# Altium PCB STM32F_Board_PCB.PcbDoc (part 2 of 2)
Units mm, origin at the board's own origin, x right, y up, seen from the top; angles counter-clockwise.
Board outline 53.26 x 36.83 mm, 2 copper layers (Top Layer, Bottom Layer), stack 1.549 mm thick; 46 components, 35 nets, 187 pads, 21 vias.
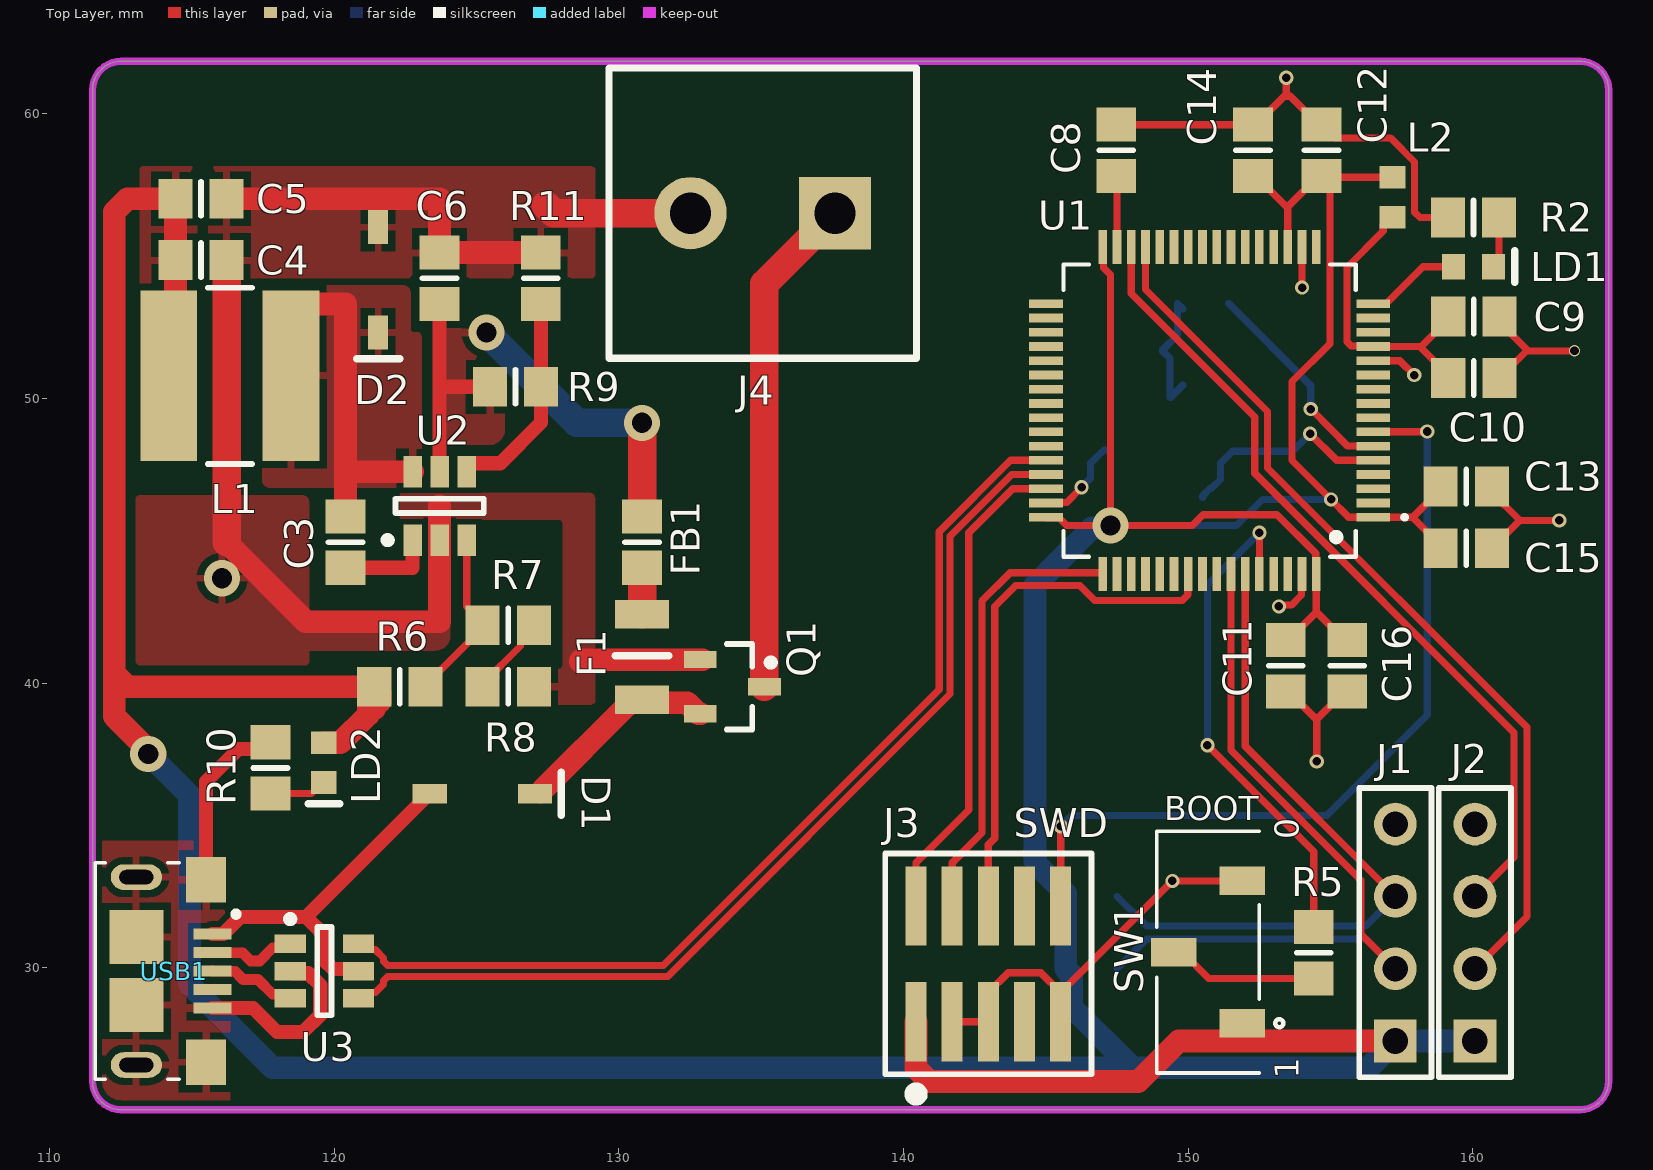
[diagram p0: Top Layer view]

## Part data (continued)
SW1: library part JS102011JCQN, "C & K COMPONENTS - Schiebeschalter, Subminiatur, SPDT, Ein-Ein, Oberflächenmontage, JS Series, 300 mA", Current Rating=300mA, Manufacturer="ITT C&K", Max Operating Temperature=85°C, Min Operating Temperature=-40°C, Supplier Part Number 1=3275788, Voltage Rating (DC)=6V, Actuator Length=2mm, Actuator Material=Nylon,Polyamide, Actuator Type=Standard, ComponentLink1Description=http://www.farnell.com/datasheets/2674788.pdf?src-supplier=Farnell, ComponentLink1URL=http://www.farnell.com/datasheets/2674788.pdf?src-supplier=Farnell, ComponentLink2Description=https://www.ckswitches.com/media/1422/js.pdf?src-supplier=Digi-Key, ComponentLink2URL=https://www.ckswitches.com/media/1422/js.pdf?src-supplier=Digi-Key, ComponentLink3Description=http://www.farnell.com/datasheets/2674788.pdf?src-supplier=Newark, ComponentLink3URL=http://www.farnell.com/datasheets/2674788.pdf?src-supplier=Newark, ComponentLink4Description=http://www.farnell.com/datasheets/2674788.pdf?src-supplier=Element14, ComponentLink4URL=http://www.farnell.com/datasheets/2674788.pdf?src-supplier=Element14, Contact Material="Copper Alloy", Contact Plating=Silver, Electrical Life=5000Cycles, Manufacturer Part Number=JS102011JCQN, Mount="Surface Mount", Packaging="Cut Tape", Pricing 1="1=0,61800, 10=0,59900, 25=0,58700, 50=0,52300, 100=0,49800, 250=0,48600, 500=0,40900 (GBP)", RoHS=Yes, Stock 1=892, Supplier 1=Farnell, Switch Function=On-On, Switch Travel=2mm, Throw Configuration=SPDT
U1: "STM32F4 MCU", Supplier Part Number 1=2064363, Built_By=EMA_UL_Team, Copyright="Copyright (C) 2018 Accelerated Designs. All rights reserved", Manufacturer_Part_Number=STM32F405RGT6, RefDes=RefDes, SourceLibrary=Updates_to_database_2020-10-19, Supplier 1=Farnell, Type=DEV, Vendor=STMicroelectronics
U2: "Voltage Regulators - Switching Regulators 1A 24V 1.4MHz Non-sync Buck", Case/Package=SOT-23-6, Manufacturer="Monolithic Power Systems", Max Input Voltage=24V, Max Operating Temperature=85°C, Max Output Current=1.2A, Max Output Voltage=15V, Min Input Voltage=4.5V, Min Operating Temperature=-40°C, Min Output Voltage=810mV, Output Power=568mW, Package Quantity=500, Supplier Part Number 1=3357992, Switching Frequency=1.4MHz, Category="Voltage Regulators - Switching", ComponentLink1Description=http://www.mouser.com/ds/2/277/MP2359_r1.21-477634.pdf?src-supplier=Mouser, ComponentLink1URL=http://www.mouser.com/ds/2/277/MP2359_r1.21-477634.pdf?src-supplier=Mouser, ComponentLink2Description=https://www.monolithicpower.com/DesktopModules/DocumentManage/API/Document/GetDocument?id=269&src-supplier=Avnet, ComponentLink2URL=https://www.monolithicpower.com/DesktopModules/DocumentManage/API/Document/GetDocument?id=269&src-supplier=Avnet, ComponentLink3Description=http://www.monolithicpower.com/DesktopModules/DocumentManage/API/Document/getDocument?id=269&src-supplier=Digi-Key, ComponentLink3URL=http://www.monolithicpower.com/DesktopModules/DocumentManage/API/Document/getDocument?id=269&src-supplier=Digi-Key, Efficiency=92%, Lead Free="Lead Free", Manufacturer Part Number=MP2359DJ-LF-P, Mount="Surface Mount", Number of Outputs=1, Number of Pins=6, Operating Supply Voltage=24V, Output Configuration=Positive, Output Current=1.2A, Output Type=Adjustable, Output Voltage=15V, Packaging="Tape and Reel", Pricing 1="1=1,27000, 10=1,24000, 25=1,21000, 50=1,18000, 100=1,14000, 250=1,11000, 500=1,08000, 1000=1,05000 (GBP)", RoHS=Yes, Supplier 1=Farnell, Synchronous Rectifier=No
U3: "TVS DIODE 5.25V 17V SOT23-6", Breakdown Voltage=6V, Capacitance=3.5pF, Case/Package=SOT-23, Clamping Voltage=17V, Leakage Current=150nA, Manufacturer=STMicroelectronics, Max Operating Temperature=125°C, Min Operating Temperature=-40°C, Operating Supply Voltage=1.1V, Package Quantity=3000, Peak Pulse Current=5A, Power Line Protection=Yes, Reverse Standoff Voltage=5.25V, Supplier Part Number 1=1269406, Test Current=1mA, Working Voltage=5V, Category="TVS Diodes", Clamping Voltage-Max=17V, ComponentLink1Description=https://datasheet.ciiva.com/1268/1690354-1268384.pdf?src-supplier=Element14, ComponentLink1URL=https://datasheet.ciiva.com/1268/1690354-1268384.pdf?src-supplier=Element14, ComponentLink2Description=https://datasheet.ciiva.com/4508/cd00050750-113117-4508433.pdf?src-supplier=Mouser, ComponentLink2URL=https://datasheet.ciiva.com/4508/cd00050750-113117-4508433.pdf?src-supplier=Mouser, ComponentLink3Description=https://datasheet.ciiva.com/15143/getdatasheetpartid-148465-15143789.pdf?src-supplier=Verical, ComponentLink3URL=https://datasheet.ciiva.com/15143/getdatasheetpartid-148465-15143789.pdf?src-supplier=Verical, ComponentLink4Description=https://datasheet.ciiva.com/26787/usblc6-2sc6-26787908.pdf?src-supplier=IIIC, ComponentLink4URL=https://datasheet.ciiva.com/26787/usblc6-2sc6-26787908.pdf?src-supplier=IIIC, ComponentLink5Description=https://datasheet.ciiva.com/16200/cd00050750-16200026.pdf?src-supplier=Future+Electronics, ComponentLink5URL=https://datasheet.ciiva.com/16200/cd00050750-16200026.pdf?src-supplier=Future+Electronics, ComponentLink6Description=https://datasheet.ciiva.com/41444/001184109-da-01-en-ic-esd-protecti-usblc6-2sc6-sot-23-6-stm-41444156.pdf?src-supplier=Conrad, ComponentLink6URL=https://datasheet.ciiva.com/41444/001184109-da-01-en-ic-esd-protecti-usblc6-2sc6-sot-23-6-stm-41444156.pdf?src-supplier=Conrad, Contact Plating=Tin,Matte, Data Rate=480Mbps, Depth=1.75mm, Direction=Unidirectional,Bidirectional, Element Configuration=Dual, ESD Protection=Yes, Height=1.3mm, Lead Free="Lead Free", Length=3.05mm, Manufacturer Part Number=USBLC6-2SC6, Max Breakdown Voltage=6V, Max Reverse Leakage Current=150nA, Min Breakdown Voltage=6V, Mount="Surface Mount", Number of Bidirectional Channels=2, Number of Channels=2, Number of Elements=1, Number of Pins=6, Packaging="Tape and Reel", Polarity=Unidirectional,Bidirectional, Pricing 1="5=0,34800, 50=0,28400, 100=0,21800, 500=0,18600, 1500=0,15300 (GBP)", Radiation Hardening=No, REACH SVHC="No SVHC", Reverse Breakdown Voltage=6V, RoHS=Yes, RoHS Compliant=Yes, Series=USB, Stock 1=9341, Supplier 1=Farnell, Termination=SMD/SMT, Width=1.75mm
USB1: library part USB_Micro_B, "Conn Micro USB 2.0 Type B RCP 5 POS 0.65mm Solder RA SMD 5 Terminal 1 Port T/R", Manufacturer="Amphenol ICC", Manufacturer Part Number=10118193-0001LF, Supplier Part Number 1=2751675, Category="USB Connectors", ComponentLink1Description=http://www.farnell.com/cad/1935764.pdf?src-supplier=Farnell, ComponentLink1URL=http://www.farnell.com/cad/1935764.pdf?src-supplier=Farnell, ComponentLink2Description=http://www.farnell.com/datasheets/2366786.pdf?src-supplier=Newark, ComponentLink2URL=http://www.farnell.com/datasheets/2366786.pdf?src-supplier=Newark, Pricing 1="10=0,27100, 100=0,23200, 500=0,21300, 1000=0,20100, 2500=0,20000, 5000=0,18300 (GBP)", RoHS=Yes, Stock 1=28194, Supplier 1=Farnell
Y1: library part Crystal_16MHz_3225, "Oscillator, 16Mhz, 3.2Mm X 2.5Mm, Cmos Frequency Nom 16Mhz", Manufacturer=ABRACON, Manufacturer Part Number=ABM8AIG-16.000MHZ-12-2Z-T, Supplier Part Number 1=2849442, Pricing 1="5=0,58300, 50=0,47400, 250=0,41200, 500=0,40100, 1500=0,39600, 3000=0,39000, 15000=0,38200, 30000=0,37400 (GBP)", Stock 1=655, Supplier 1=Farnell

## Via types
v1: diameter 0.5, hole 0.3, Top Layer to Bottom Layer, 15 vias
v2: diameter 1.27, hole 0.711, Top Layer to Bottom Layer, 5 vias
v3: diameter 0.4, hole 0.3, Top Layer to Bottom Layer, 1 vias

## Nets (pads, with @x,y where several pads share a name; then routed paths per layer and width w, separated by ;. In a path a pad name is that pad's centre, name@x,y a point inside that pad or via, vN(x,y) a via of type N, cw(c..) or ccw(c..) an arc to the next point about the centre after c; other vN are vias at no path point)
+3V3: C4.2 C5.2 C11.2 C12.2 C13.2 C14.2 C15.2 C16.1 J1.1 J2.1 J3.1 L1.2 L2.1 LD2.1 R3.2 R4.2 R6.2 SW1.1 U1.1 U1.19 U1.32 U1.48 U1.64 | length 197.3
  Top Layer w0.254: U1.48 145.024,45.805 145.469,45.805 145.732,45.542 146.8,45.542 146.96,45.702 v2@146.96,45.851 ; U1.32 147.02,55.31 147.02,54.598 147.269,54.349 147.269,46.012 147.079,45.822 146.99,45.822 v2(147.269,45.542) 150.141,45.542 150.522,45.923 153.118,45.923 154.478,44.563 154.478,43.851 U1.64 154.499,42.49 ; C14.2 152.373,57.825 153.499,56.699 ; C11.2 153.524,41.515 154.499,42.49 ; U1.19 153.499,56.699 ; C12.2@154.978,57.825 C12.2 154.586,57.825 153.499,56.738 153.499,56.699 ; C16.1 155.486,41.515 154.511,42.49 154.499,42.49 ; L2.1 154.978,57.774 154.978,51.931 153.649,50.601 153.649,47.824 v1(155.016,46.457) 155.642,45.831 U1.1 157.879,45.831 ; C15.2 158.866,44.844 157.879,45.831 ; C13.2 158.866,46.807 157.89,45.831 157.879,45.831
  Top Layer w0.8: v2(113.462,37.516) 113.462,37.643 112.268,38.837 112.268,40.347 ; L1.2@114.416,50.165 C4.2 C5.2 112.737,57.023 112.268,56.554 112.268,40.347 ; LD2.1 120.207,37.911 121.201,38.905 R6.2@121.201,39.327 ; 120.766,39.878 112.737,39.878 112.268,40.347 ; 121.412,39.116 R6.2@121.201,39.327 ; R6.2@121.601,39.361 121.601,39.678 R6.2 121.201,39.678 R6.2@121.201,39.327 ; J3.1 140.437,26.478 140.905,26.01 148.244,26.01 149.666,27.432 J1.1
  Bottom Layer w0.254: v2(147.269,45.542) 151.696,45.542 152.61,46.457 v1(155.016,46.457)
  Bottom Layer w0.8: v2(113.462,37.516) 114.91,36.068 114.91,29.413 117.831,26.492 148.031,26.492 ; v2(147.269,45.542) 147.179,45.452 146.62,45.452 145.489,44.321 144.613,43.444 144.613,33.697 145.698,32.612 R3.2 R4.2 145.898,29.772 145.898,28.626 148.031,26.492 ; J2.1 J1.1 156.337,26.492 148.031,26.492
+3V3VA: C9.2 C10.2 L2.2 U1.13 | length 10.7
  Top Layer w0.254: L2.2 157.125,56.374 156.852,56.101 156.852,55.887 155.575,54.61 155.575,52 155.724,51.851 156.478,51.851 U1.13 158.182,51.831 ; C10.2 159.134,50.824 158.182,51.776 158.182,51.831 ; C9.2 159.134,52.783 158.182,51.831
+5V: D1.1 U3.5 USB1.1 | length 12.8
  Top Layer w0.5: USB1.1 116.095,31.19 116.697,31.792 119.008,31.792 ; U3.5 120.774,29.965 119.955,29.965 119.649,30.271 119.649,31.151 119.008,31.792 ; D1.1@123.343,36.127 119.008,31.792
+12V: J4.1 Q1.1 | length 17.7
  Top Layer w1: Q1.1 135.11,54.033 J4.1
BOOT0: R5.1 U1.60 | length 17.6
  Top Layer w0.254: v1(150.673,37.821) 154.407,34.087 R5.1 ; U1.60 152.502,43.833 v1(152.502,45.288)
  Bottom Layer w0.254: v1(150.673,37.821) 150.673,43.459 v1(152.502,45.288)
BUCK_FB: R6.1 R7.2 U2.3 | length 6.2
  Top Layer w0.254: R6.1 123.201,39.978 123.674,40.451 123.725,40.451 125.211,41.937 125.211,42.137 R7.2@124.648,42.7
  Top Layer w0.255: R7.2@124.648,42.7 U2.3
GND: C1.1 C2.2 C4.1 C5.1 C6.1 C7.1 C8.1 C9.1 C10.1 C11.1 C12.1 C13.1 C14.1 C15.1 C16.2 D2.1 J1.4 J2.4 J3.3 J3.5 J3.9 J4.2 Q1.3 R2.1 R8.1 R10.1 R11.1 SW1.3 U1.12 U1.18 U1.63 U2.2 U3.2 USB1.5 USB1.S1 USB1.S2 USB1.S3 USB1.S4 USB1.S5 USB1.S6 Y1.2 Y1.4 | length 105.7
  Top Layer w0.254: J3.3 J3.5 142.977,29.134 143.674,29.831 144.82,29.831 J3.9@145.517,29.134 ; J3.9 J3.9@145.517,29.134 ; C8.1 C14.1 ; v1@149.428,33.045 J3.9@145.517,29.134 ; v1(149.443,33.056) SW1.3 ; C14.1@152.373,59.625 153.247,60.499 153.374,60.626 ; v1(153.187,42.697) 153.234,42.744 153.624,42.744 153.978,43.098 153.978,43.81 U1.63 ; v1(153.445,61.269) 153.445,60.697 153.374,60.626 ; C11.1@153.524,39.715 154.499,38.739 154.511,38.739 ; v1(154,53.899) U1.18 ; v1(154.511,37.253) 154.511,38.739 ; C12.1@154.586,59.625 153.585,60.626 153.374,60.626 ; C12.1 155.159,59.152 157.11,59.152 157.952,58.309 157.952,56.549 158.139,56.363 R2.1 ; C16.2@155.486,39.715 154.511,38.739 ; U1.12@156.52,51.31 U1.12 157.432,51.331 v1(157.937,50.825) ; J1.4@157.121,35.039 J1.4 ; C15.1 161.642,45.72 161.653,45.72 ; C13.1@160.666,46.707 161.653,45.72 ; C10.1@160.934,50.624 C10.1 161.886,51.676 v3(163.57,51.676) ; C9.1@160.934,52.683 161.886,51.731 ; v1(163.033,45.72) 161.653,45.72
  Top Layer w0.5: USB1.S1 115.495,36.552 116.631,37.687 117.517,37.687 R10.1 ; USB1.5 117.145,28.59 117.99,27.745 118.901,27.745 119.503,28.346 119.503,29.397 119.086,29.815 118.524,29.815 U3.2
  Top Layer w0.8: 116.216,44.947 118.999,42.164 123.698,42.164 U2.2 123.698,46.228 ; C5.1 121.412,57.023 123.698,57.023 C6.1 R11.1 ; 128.651,40.767 cw(c128.712,40.767) 128.712,40.828 Q1.3 Q1.3@132.935,40.828
  Top Layer w1: 116.216,44.947 C4.1 ; 127.432,56.794 127.711,56.515 J4.2
  other v2: 116.053,43.688
HSE_IN: C1.2 U1.5 Y1.1 | length 7.6
  Top Layer w0.254: v1(154.28,48.768) 155.217,47.831 U1.5
  Bottom Layer w0.254: C1.2 150.506,46.583 150.779,46.856 150.829,46.856 151.133,47.16 151.133,47.725 151.556,48.148 Y1.1@151.629,48.148 ; Y1.1 153.66,48.148 v1(154.28,48.768)
HSE_OUT: R1.2 U1.6 | length 7.6
  Top Layer w0.254: v1(154.305,49.632) 154.308,49.632 154.996,48.944 154.996,48.94 155.606,48.331 U1.6
  Bottom Layer w0.254: R1.2 154.305,50.455 v1(154.305,49.632)
I2C1_SCL: J1.2 R4.1 U1.58 | length 26.9
  Top Layer w0.254: U1.58 151.499,37.648 156.07,33.077 156.07,31.179 J1.2
  Bottom Layer w0.254: R4.1 148.541,31.015 156.234,31.015 J1.2
I2C1_SDA: J1.3 R3.1 U1.59 | length 24.1
  Top Layer w0.254: U1.59 151.999,37.79 J1.3
  Bottom Layer w0.254: R3.1 148.541,31.469 156.234,31.469 J1.3
LED_STATUS: LD1.1 U1.16 | length 3.4
  Top Layer w0.254: U1.16 156.944,53.331 158.248,54.635 LD1.1
NetC2_1: C2.1 R1.1 Y1.3 | length 4.5
  Bottom Layer w0.254: Y1.3@149.806,50.471 149.383,50.048 Y1.3 149.356,51.414 C2.1 149.106,51.714 149.62,52.228 R1.1 R1.1@149.806,53.154
NetC3_1: C3.1 D2.2 L1.1 U2.6 | length 14.9
  Top Layer w0.8: L1.1@118.491,50.165 118.491,53.323 120.396,53.323 120.396,47.428 ; C3.1 120.396,47.428 ; U2.6 120.396,47.428
NetC3_2: C3.2 U2.1 | length 3.3
  Top Layer w0.5: C3.2 122.748,44.058 U2.1
NetC6_2: C6.2 FB1.2 R9.2 U2.5 | length 17.7
  Top Layer w0.5: U2.5 123.698,50.419 ; C6.2 123.698,50.419 ; R9.2 123.698,50.419
  Top Layer w1: FB1.2 v2(130.81,49.149)
  Bottom Layer w1: v2(125.349,52.324) 128.524,49.149 v2(130.81,49.149)
NetC7_2: C7.2 U1.47 | length 3.2
  Top Layer w0.254: U1.47 145.02,46.351 145.731,46.351 146.253,46.873 v1(146.253,46.883)
  Bottom Layer w0.254: v1(146.253,46.883) 146.569,47.199 146.569,47.725 147.042,48.198 C7.2
NetC8_2: C8.2 U1.31 | length 2.5
  Top Layer w0.254: C8.2 147.499,57.798 U1.31
NetD1_2: D1.2 F1.1 Q1.2 | length 6.6
  Top Layer w0.8: D1.2@127.251,36.169 127.301,36.219 127.301,36.242 130.26,39.201 F1.1@130.26,39.318 ; F1.1 130.91,39.318 132.395,39.318 132.785,38.928 Q1.2
NetF1_2: F1.2 FB1.1 | length 1.6
  Top Layer w1: F1.2 FB1.1
NetLD1_2: LD1.2 R2.2 | length 1.8
  Top Layer w0.254: LD1.2 160.92,54.835 R2.2
NetLD2_2: LD2.2 R10.2 | length 2.4
  Top Layer w0.254: R10.2 119.197,36.124 119.584,36.511 LD2.2 LD2.2@119.907,36.784
NetR5_2: R5.2 SW1.2 | length 5.3
  Top Layer w0.254: SW1.2 149.798,30.556 150.724,29.631 R5.2
NetR7_1: R7.1 R8.2 | length 3.5
  Top Layer w0.254: R8.2 125.211,39.978 126.538,41.305 126.538,41.564 R7.1
  Top Layer w0.5: R8.2 R8.2@125.561,40.228 ; R7.1@127.011,41.937 R7.1
NetR9_1: R9.1 R11.2 U2.4 | length 7.6
  Top Layer w0.5: U2.4 124.648,47.653 124.723,47.728 125.833,47.728 127.265,49.16 127.265,53.329 R11.2
NRST: J3.10 U1.7 | length 29.2
  Top Layer w0.254: J3.10 v1(145.517,34.976) ; U1.7 156.506,48.837 158.388,48.837 v1(158.394,48.844)
  Bottom Layer w0.254: v1(145.517,34.976) 145.898,35.357 154.864,35.357 158.394,38.887 v1(158.394,48.844)
SWCLK: J3.4 U1.49 | length 15.8
  Top Layer w0.254: J3.4 141.707,33.695 142.75,34.738 142.75,42.885 143.749,43.885 146.974,43.885 146.999,43.859 U1.49
SWDIO: J3.2 U1.46 | length 17.2
  Top Layer w0.254: J3.2 140.437,33.695 142.291,35.549 142.291,45.288 143.833,46.831 144.958,46.831 144.978,46.81 U1.46
SWO: J3.6 U1.55 | length 18.7
  Top Layer w0.254: J3.6 142.977,34.323 143.204,34.55 143.204,42.697 143.937,43.431 146.187,43.431 146.711,42.907 149.787,42.907 149.978,43.098 149.978,43.81 U1.55
USART3_RX: J2.3 U1.30 | length 29
  Top Layer w0.254: U1.30 147.999,53.689 152.332,49.356 152.332,47.378 161.446,38.264 161.446,33.887 J2.3
USART3_TX: J2.2 U1.29 | length 31.7
  Top Layer w0.254: U1.29 148.499,53.831 152.786,49.544 152.786,47.566 161.9,38.452 161.9,31.801 J2.2
USB_DATA_N: U1.45 U3.4 | length 35.1
  Top Layer w0.254: U3.4 121.047,29.138 121.435,29.138 121.726,29.429 121.726,29.55 121.875,29.699 131.711,29.699 141.63,39.619 141.63,45.167 143.795,47.331 U1.45
USB_DATA_P: U1.44 U3.6 | length 35.1
  Top Layer w0.254: U3.6 121.047,30.642 121.435,30.642 121.726,30.35 121.726,30.229 121.875,30.08 131.553,30.08 141.249,39.776 141.249,45.324 143.756,47.831 U1.44
USB_IN_N: U3.1 USB1.2 | length 3.1
  Top Layer w0.381: USB1.2 116.195,30.54 116.205,30.53 116.776,30.53 117.062,30.245 117.377,30.245 117.837,30.705 118.315,30.705 U3.1
USB_IN_P: U3.3 USB1.3 | length 3.1
  Top Layer w0.381: USB1.3 115.73,29.88 116.507,29.88 116.792,29.595 117.317,29.595 117.837,29.074 118.315,29.074 U3.3
pads on no net: J3.7 J3.8 U1.2 U1.3 U1.4 U1.8 U1.9 U1.10 U1.11 U1.14 U1.15 U1.17 U1.20 U1.21 U1.22 U1.23 U1.24 U1.25 U1.26 U1.27 U1.28 U1.33 U1.34 U1.35 U1.36 U1.37 U1.38 U1.39 U1.40 U1.41 U1.42 U1.43 U1.50 U1.51 U1.52 U1.53 U1.54 U1.56 U1.57 U1.61 U1.62 USB1.4

## Polygon pours and split planes (outlines as drawn)
GND on Top Layer "GND_L01_P000" (solid, pour order 0): 113.157,46.609 118.872,46.609 cw(c118.872,46.355) 119.126,46.355 119.126,40.767 cw(c118.999,40.767) 118.999,40.64 113.157,40.64 cw(c113.157,40.767) 113.03,40.767 113.03,46.482 cw(c113.157,46.482)
GND on Top Layer "GND_L01_P012" (solid, pour order 12): 116.347,34.462 116.347,25.318 111.394,25.318 111.394,34.462
NetC6_2 on Top Layer "NETC6_2_L01_P007" (solid, pour order 7): 125.476,48.387 123.698,48.387 123.698,53.34 125.73,53.34 cw(c125.73,53.086) 125.984,53.086 125.984,48.895 cw(c125.476,48.895)
GND on Top Layer "GND_L01_P006" (solid, pour order 6): 125.832,46.7 128.941,46.7 cw(c128.941,46.482) 129.159,46.482 129.159,39.37 cw(c129.032,39.37) 129.032,39.243 127.254,39.243 127.254,40.513 127.889,40.513 ccw(c127.889,40.64) 128.016,40.64 128.016,45.618 ccw(c127.889,45.618) 127.889,45.745 125.832,45.745
GND on Top Layer "GND_L01_P005" (solid, pour order 5): 123.317,45.669 ccw(c123.241,45.669) 123.241,45.745 122.377,45.745 cw(c122.377,45.822) 122.301,45.822 122.301,46.609 cw(c122.392,46.609) 122.392,46.7 126.492,46.7 126.492,45.745 124.155,45.745 ccw(c124.155,45.669) 124.079,45.669
+3V3 on Top Layer "+3V3_L01_P003" (solid, pour order 3): 113.157,53.086 113.157,58.039 cw(c113.284,58.039) 113.284,58.166 114.935,58.166 cw(c114.935,57.912) 115.189,57.912 115.189,53.086
NetC3_1 on Top Layer "NETC3_1_L01_P002" (solid, pour order 2): 122.682,53.721 122.682,52.451 ccw(c122.809,52.451) 122.809,52.324 122.936,52.324 cw(c122.936,52.197) 123.063,52.197 123.063,47.117 cw(c122.809,47.117) 122.809,46.863 117.729,46.863 cw(c117.729,47.117) 117.475,47.117 117.475,53.721 cw(c117.729,53.721) 117.729,53.975 122.428,53.975 cw(c122.428,53.721)
GND on Top Layer "GND_L01_P001" (solid, pour order 1): 129.032,58.166 115.824,58.166 ccw(c115.824,57.912) 115.57,57.912 115.57,54.356 ccw(c115.697,54.356) 115.697,54.229 129.032,54.229 ccw(c129.032,54.356) 129.159,54.356 129.159,58.039 ccw(c129.032,58.039)
GND on Top Layer "GND_L01_P008" (solid, pour order 8): 124.079,42.164 124.079,41.681 cw(c123.546,41.681) 123.546,41.148 118.745,41.148 118.745,42.164
GND on Bottom Layer "GND_L02_P015" (solid, remove dead copper, pour order 15): 111.531,61.9 111.608,61.824 164.77,61.824 164.77,24.994 164.643,24.867 111.506,24.867 111.506,61.9

## Keep-outs
Keep-Out Layer:
  the board outline again, w0.254

## Silkscreen, mask and mechanical layers (free items; w line width, h text height)
Top Overlay:
  text "BOOT" at 149.149,35.179 h0.85
  text "0" at 153.873,34.519 h0.85 r90
  text "1" at 153.873,26.111 h0.85 r90
Bottom Overlay:
  drawing of 1002 lines, arcs and shapes, not listed
  text "+12V" at 133.909,59.233 h0.85
  text "GND" at 138.735,59.233 h0.85
  text "STM32F_Board V1.0" at 114.238,46.406 h0.85 r270
  text "Stefan Milivojčev" at 115.904,46.406 h0.85 r270
  text "I2C" at 156.852,37.751 h0.85 r270
  text "USART" at 159.563,36.83 h0.85 r270
  text "GND" at 154.305,34.646 h0.85
  text "SDA" at 153.416,32.106 h0.85
  text "Rx" at 154.737,31.75 h0.85 r270
  text "SCL" at 153.416,29.566 h0.85
  text "Tx" at 154.737,29.21 h0.85 r270
  text "QCpass" at 118.313,27.915 h0.8 r270
  text "Prog" at 119.837,27.915 h0.8 r270
  text "Ass" at 121.361,27.915 h0.8 r270
  text "+3V3" at 154.686,27.026 h0.85